# Altium PCB PCB1.PcbDoc
Units mil, origin at the board's own origin, x right, y up, seen from the top; angles counter-clockwise.
Board outline 3937.01 x 3937.01 mil, 2 copper layers (Top Layer, Bottom Layer), stack 12.8 mil thick; 17 components, 118 nets, 302 pads, 11 vias.
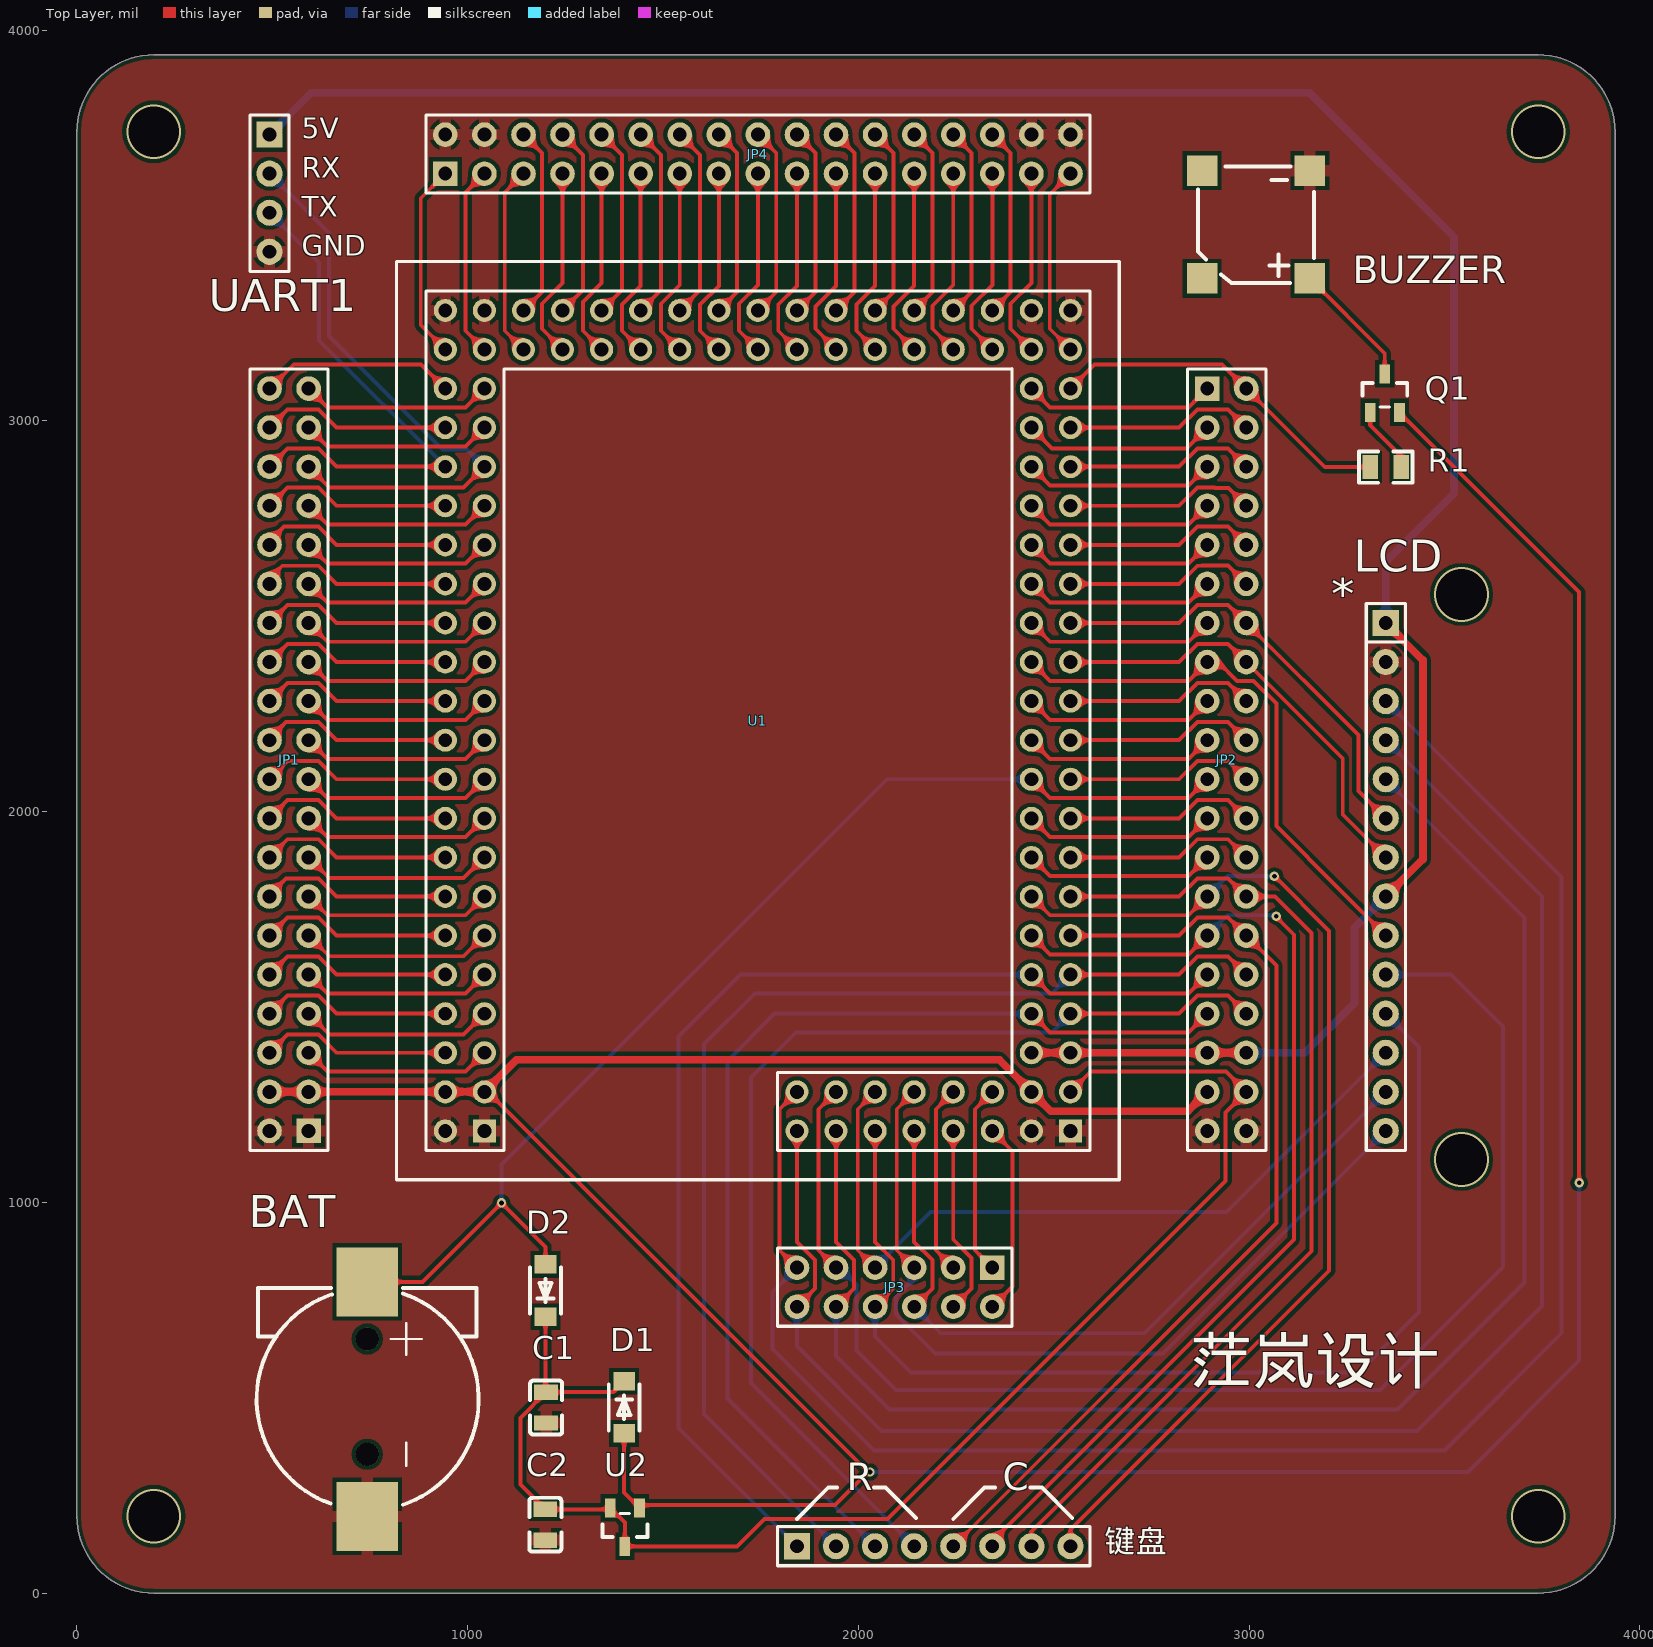
[diagram p0: Top Layer view]
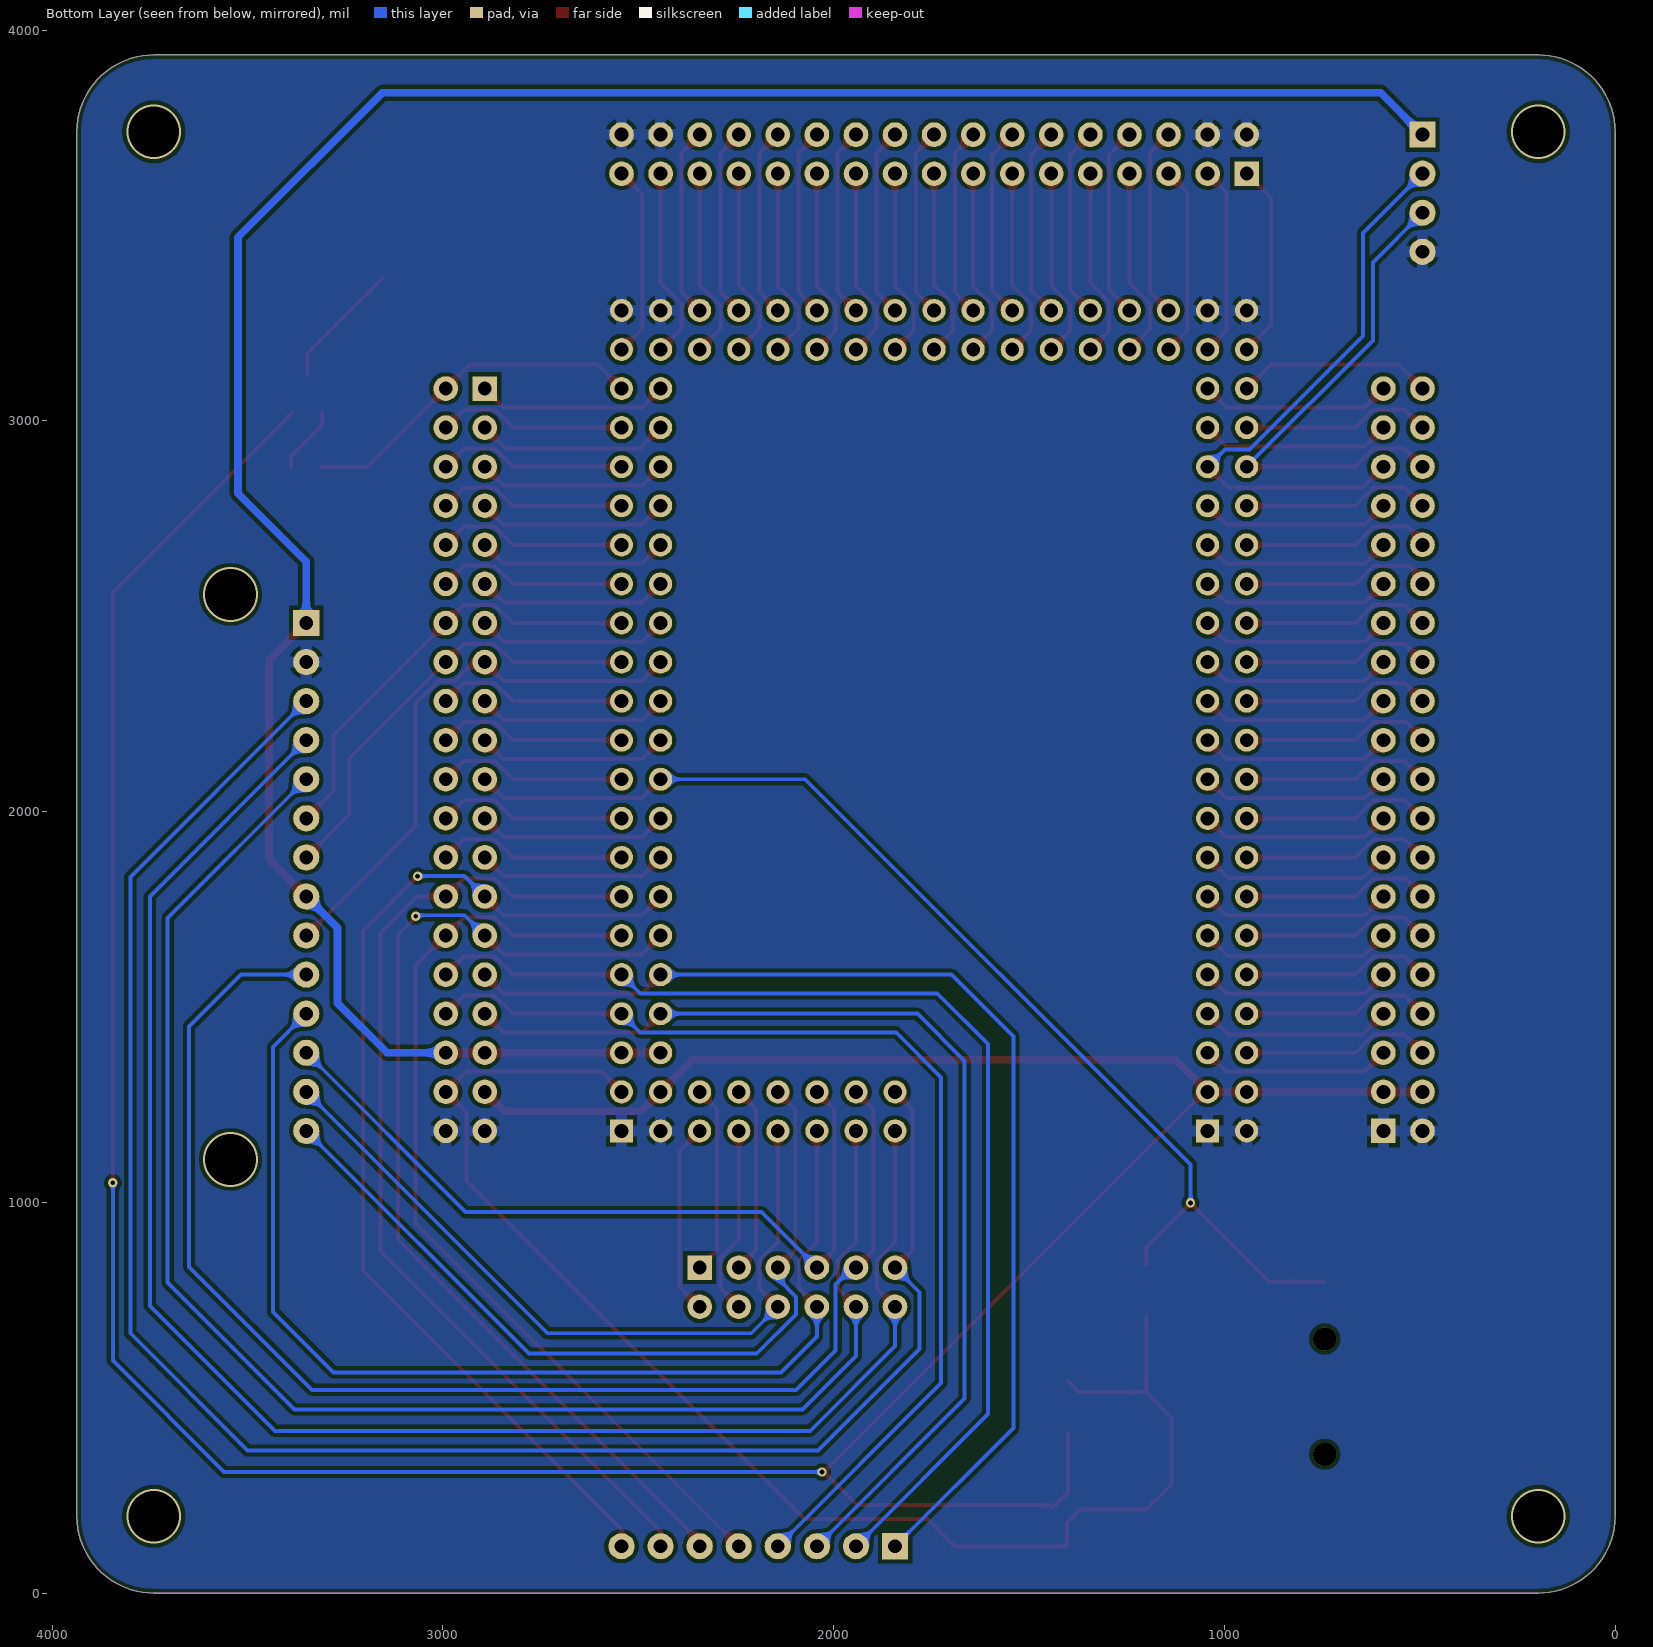
[diagram p1: Bottom Layer view, seen from below]

## Layer stack, top to bottom
Top Solder: solder mask 0.4, Solder Resist, Dk 3.5
Top Layer: signal copper 1.4
Dielectric 1: core 10, FR-4, Dk 4.2
Bottom Layer: signal copper 1.4
Solder Side: solder mask 0.4, Solder Resist, Dk 3.5

## Board outline
0,196.85 0,3740.16 cw(c196.85,3740.16) 196.85,3937.01 3740.16,3937.01 cw(c3740.16,3740.16) 3937.01,3740.16 3937.01,196.85 cw(c3740.16,196.85) 3740.16,0 196.85,0 cw(c196.85,196.85)

## Design rules (kind name [scope] priority, off if disabled: settings)
Clearance [All] p1: gap=10 ignorepadtopadclearanceinfootprint=FALSE except(0: Arc-Hole Track-Hole SMDPad-Hole THPad-Hole Via-Hole Fill-Hole Poly-Hole Region-Hole Text-Hole)
HoleSize [All] p1: absolutevalues=TRUE maxlimit=500 minlimit=1 maxpercent=80.000 minpercent=20.000
PlaneConnect [All] p1: planeconnectstyle=Relief reliefexpansion=20 reliefentries=4 reliefconductorwidth=15 reliefairgap=10
PolygonConnect [All] p1: connectstyle=Relief reliefconductorwidth=30 reliefentries=4 polygonreliefangle="90 Angle" airgapwidth=10
RoutingVias [All] p1: holewidth=24 width=12 viastyle="Through Hole" minholewidth=12 minwidth=24 maxholewidth=200 maxwidth=400
SilkToSolderMaskClearance [IsPad] p1: minsilkscreentomaskgap=1 clearancetoexposedcopper=TRUE
SolderMaskExpansion [All] p1: expansion=4
Width [All] p1: maxlimit=40 minlimit=10 preferedwidth=20
27 further rules are at their usual default settings.

## Components (designator, comment, footprint, x,y, rotation, side; value= is the part's Value field where it differs from the comment)
BAT "" BAT_SMD 745,495 r270 top
BUZZER "Buzzer" 7525蜂鸣器 3020,3500 r180 top (schematic designator Q2)
C1 "104" 0805C 1200,475 r90 top
C2 "104" 0805C 1200,175 r270 top
D1 "1N4148" SOD-123 1400,475 r90 top
D2 "1N4148" SOD-123 1200,775 r270 top
JP1 "Header 2X11" HDR-20X2 593,1183 r90 top
JP2 "Header 2X11" HDR-20X2 2893,3083 r270 top
JP3 "Header 6X2" HDR-6X2 2343,833 r180 top
JP4 "Header 2X11" HDR-17X2 943,3633 r0 top
LCD "HDR-1X14" HDR-1X14_M 3350,2483 r270 top
Q1 "S8550" BAT54C/S8550 3350,3065 r270 top
R1 "1K" 0805R 3350,2883 r0 top
U1 "STM32F407" STM32F407ZGT6 1743,2233 r90 top locked
U2 "BAT54C" BAT54C 1400,175 r90 top
UART1 "HDR-1X4" HDR-1X4 493,3733 r270 top locked
键盘 "HDR-1X8" HDR-1X8_M 1843,120 r0 top

## Footprints (in the part's own frame and the unit in brackets; to place one, negate y for a bottom-side part, rotate by r counter-clockwise, add the part's x,y. Pads: shape width x height; smd on the part's side, far side on the other; paste and mask are expansions set on the pad)
0805C [mm]
  rect 1x1.55 smd: 1(-1.003,-0.027) 2(0.997,-0.027)
  silkscreen extent -1.75,-1.07 1.75,1.01, body extent -1,-0.61 1,0.61, height 0.51
0805R [mm]
  rect 1x1.55 smd: 1(-1.003,-0.021) 2(0.997,-0.021)
  silkscreen extent -1.75,-1.04 1.75,1, body extent -1,-0.63 1,0.63, height 0.55
7525蜂鸣器 [mm]
  rect 2x2 smd: 1(-3.445,3.428) 2(-3.445,-3.572) 3(3.555,-3.572) 4(3.555,3.428)
  silkscreen extent -3.73,-3.83 3.81,3.74
BAT54C [mm]
  rect 1.25x0.7 smd: 1(1.092,0.886) 2(1.092,-1.014) 3(-1.407,-0.064)
  silkscreen extent -0.81,-1.52 0.74,1.4, body extent -1.53,-1.51 1.27,1.39, height 1.2
BAT54C/S8550 [mm]
  rect 1.25x0.7 smd: 1(1.092,0.886) 2(1.092,-1.014) 3(-1.407,-0.064)
  silkscreen extent -0.81,-1.52 0.74,1.4, body extent -1.53,-1.51 1.27,1.39, height 1.2
BAT_SMD [mm]
  rect 4.5x4 smd: 1(-7.656,-0.045) 2(7.584,-0.045)
  round 1.5 hole 1.5 unplated: ""(-3.947,-0.045) ""(3.546,-0.045)
  silkscreen extent -7.26,-7.23 6.83,7.2, body extent -9.33,-7.76 9.27,7.24, height 4.3
HDR-1X4 [mm] "排针，4脚"
  rect 1.7x1.7 hole 0.9: 1(0,0)
  round 1.7 hole 0.9: 2(2.54,0) 3(5.08,0) 4(7.62,0)
  silkscreen extent -1.27,-1.27 8.89,1.27, body extent -1.27,-1.27 8.89,1.27, height 8.5
HDR-1X8_M [mm] "排母，8脚"
  rect 1.7x1.7 hole 0.9: 1(0,0)
  round 1.7 hole 0.9: 2(2.54,0) 3(5.08,0) 4(7.62,0) 5(10.16,0) 6(12.7,0) 7(15.24,0) 8(17.78,0)
  silkscreen extent -1.27,-1.27 19.05,1.27, body extent -1.27,-1.27 19.05,1.27, height 8.5
HDR-1X14_M [mm] "排母，14脚"
  rect 1.7x1.7 hole 0.9: 1(0,0)
  round 1.7 hole 0.9: 2(2.54,0) 3(5.08,0) 4(7.62,0) 5(10.16,0) 6(12.7,0) 7(15.24,0) 8(17.78,0) 9(20.32,0) 10(22.86,0) 11(25.4,0) 12(27.94,0) 13(30.48,0) 14(33.02,0)
  silkscreen extent -1.27,-1.27 34.29,1.27, body extent -1.27,-1.27 34.29,1.27, height 8.5
HDR-6X2 [mm] "双排排针，6x2脚"
  rect 1.6x1.6 hole 0.9: 1(0,0)
  round 1.6 hole 0.9: 2(0,2.54) 3(2.54,0) 4(2.54,2.54) 5(5.08,0) 6(5.08,2.54) 7(7.62,0) 8(7.62,2.54) 9(10.16,0) 10(10.16,2.54) 11(12.7,0) 12(12.7,2.54)
  silkscreen extent -1.27,-1.27 13.97,3.81, body extent -1.27,-1.27 13.97,3.81, height 8.5
HDR-17X2 [mm] "双排排针，17x2脚"
  rect 1.6x1.6 hole 0.9: 1(0,0)
  round 1.6 hole 0.9: 2(0,2.54) 3(2.54,0) 4(2.54,2.54) 5(5.08,0) 6(5.08,2.54) 7(7.62,0) 8(7.62,2.54) 9(10.16,0) 10(10.16,2.54) 11(12.7,0) 12(12.7,2.54) 13(15.24,0) 14(15.24,2.54) 15(17.78,0) 16(17.78,2.54) 17(20.32,0) 18(20.32,2.54) 19(22.86,0) 20(22.86,2.54) 21(25.4,0) 22(25.4,2.54) 23(27.94,0) 24(27.94,2.54) 25(30.48,0) 26(30.48,2.54) 27(33.02,0) 28(33.02,2.54) 29(35.56,0) 30(35.56,2.54) 31(38.1,0) 32(38.1,2.54) 33(40.64,0) 34(40.64,2.54)
  silkscreen extent -1.27,-1.27 41.91,3.81, body extent -1.27,-1.27 41.91,3.81, height 8.5
HDR-20X2 [mm] "双排排针，20x2脚"
  rect 1.6x1.6 hole 0.9: 1(0,0)
  round 1.6 hole 0.9: 2(0,2.54) 3(2.54,0) 4(2.54,2.54) 5(5.08,0) 6(5.08,2.54) 7(7.62,0) 8(7.62,2.54) 9(10.16,0) 10(10.16,2.54) 11(12.7,0) 12(12.7,2.54) 13(15.24,0) 14(15.24,2.54) 15(17.78,0) 16(17.78,2.54) 17(20.32,0) 18(20.32,2.54) 19(22.86,0) 20(22.86,2.54) 21(25.4,0) 22(25.4,2.54) 23(27.94,0) 24(27.94,2.54) 25(30.48,0) 26(30.48,2.54) 27(33.02,0) 28(33.02,2.54) 29(35.56,0) 30(35.56,2.54) 31(38.1,0) 32(38.1,2.54) 33(40.64,0) 34(40.64,2.54) 35(43.18,0) 36(43.18,2.54) 37(45.72,0) 38(45.72,2.54) 39(48.26,0) 40(48.26,2.54)
  silkscreen extent -1.27,-1.27 49.53,3.81, body extent -1.27,-1.27 49.53,3.81, height 8.5
SOD-123 [mm]
  rect 1.2x1.4 smd: 1(-1.686,-0.016) 2(1.714,-0.016)
  silkscreen extent -1.49,-1.02 1.51,0.98, body extent -1.8,-0.89 2.05,0.81, height 1.42
STM32F407ZGT6 [mm]
  rect 1.5x1.5 hole 0.9: 1(-26.67,17.78) 113(-26.67,-20.32)
  round 1.5 hole 0.9: 2(-26.67,20.32) 3(-24.13,17.78) 4(-24.13,20.32) 5(-21.59,17.78) 6(-21.59,20.32) 7(-19.05,17.78) 8(-19.05,20.32) 9(-16.51,17.78) 10(-16.51,20.32) 11(-13.97,17.78) 12(-13.97,20.32) 13(-11.43,17.78) 14(-11.43,20.32) 15(-8.89,17.78) 16(-8.89,20.32) 17(-6.35,17.78) 18(-6.35,20.32) 19(-3.81,17.78) 20(-3.81,20.32) 21(-1.27,17.78) 22(-1.27,20.32) 23(1.27,17.78) 24(1.27,20.32) 25(3.81,17.78) 26(3.81,20.32) 27(6.35,17.78) 28(6.35,20.32) 29(8.89,17.78) 30(8.89,20.32) 31(11.43,17.78) 32(11.43,20.32) 33(13.97,17.78) 34(13.97,20.32) 35(16.51,17.78) 36(16.51,20.32) 37(19.05,17.78) 38(19.05,20.32) 39(21.59,17.78) 40(21.59,20.32) 41(24.13,17.78) 42(24.13,20.32) 43(26.67,17.78) 44(26.67,20.32) 45(24.13,15.24) 46(26.67,15.24) 47(24.13,12.7) 48(26.67,12.7) 49(24.13,10.16) 50(26.67,10.16) 51(24.13,7.62) 52(26.67,7.62) 53(24.13,5.08) 54(26.67,5.08) 55(24.13,2.54) 56(26.67,2.54) 57(24.13,0) 58(26.67,0) 59(24.13,-2.54) 60(26.67,-2.54) 61(24.13,-5.08) 62(26.67,-5.08) 63(24.13,-7.62) 64(26.67,-7.62) 65(24.13,-10.16) 66(26.67,-10.16) 67(24.13,-12.7) 68(26.67,-12.7) 69(24.13,-15.24) 70(26.67,-15.24) 71(24.13,-17.78) 72(26.67,-17.78) 73(24.13,-20.32) 74(26.67,-20.32) 75(21.59,-20.32) 76(21.59,-17.78) 77(19.05,-20.32) 78(19.05,-17.78) 79(16.51,-20.32) 80(16.51,-17.78) 81(13.97,-20.32) 82(13.97,-17.78) 83(11.43,-20.32) 84(11.43,-17.78) 85(8.89,-20.32) 86(8.89,-17.78) 87(6.35,-20.32) 88(6.35,-17.78) 89(3.81,-20.32) 90(3.81,-17.78) 91(1.27,-20.32) 92(1.27,-17.78) 93(-1.27,-20.32) 94(-1.27,-17.78) 95(-3.81,-20.32) 96(-3.81,-17.78) 97(-6.35,-20.32) 98(-6.35,-17.78) 99(-8.89,-20.32) 100(-8.89,-17.78) 101(-11.43,-20.32) 102(-11.43,-17.78) 103(-13.97,-20.32) 104(-13.97,-17.78) 105(-16.51,-20.32) 106(-16.51,-17.78) 107(-19.05,-20.32) 108(-19.05,-17.78) 109(-21.59,-20.32) 110(-21.59,-17.78) 111(-24.13,-20.32) 112(-24.13,-17.78) 114(-26.67,-17.78) 115(-26.67,-15.24) 116(-24.13,-15.24) 117(-26.67,-12.7) 118(-24.13,-12.7) 119(-26.67,-10.16) 120(-24.13,-10.16) 121(-26.67,-7.62) 122(-24.13,-7.62) 123(-26.67,-5.08) 124(-24.13,-5.08) 125(-26.67,-2.54) 126(-24.13,-2.54)
  silkscreen extent -29.84,-23.5 29.84,23.5, body extent -27.94,-21.59 27.94,21.59, height 8.5

## Part data
BAT: library part battery
C1 C2: library part Capacitor, "电容", BOM名称=无极性, 学习资源=www.ooocke.
D1 D2: library part 二极管
JP1 JP2: library part "Header 20X2u", "20*2P接插件", BOM名称=20*2P接, 学习资源=www.ooocke.
JP3: library part "Header  6X2u", "6*2P接插件", BOM名称=6*2P接, 学习资源=www.ooocke.
JP4: library part "Header 17X2u", "17*2P接插件", BOM名称=17*2P接, 学习资源=www.ooocke.
LCD: library part "Header 14u", "14P接插件", BOM名称=14P接, 学习资源=www.ooocke.
R1: library part Resistor, "电阻", BOM名称=ÌùÆ, 学习资源=www.ooocke.
U1: "Header, 126-Pin, Dual row", LatestRevisionDate=17-Jul-2002, LatestRevisionNote="Re-released for DXP Platform.", Publisher="Altium Limited"
UART1: library part "Header 4u", "4P接插件", BOM名称=4P接, 学习资源=www.ooocke.
键盘: library part "Header 8u", "8P接插件", BOM名称=8P接, 学习资源=www.ooocke.

## Via types
v1: diameter 140, hole 130, Top Layer to Bottom Layer, 6 vias
v2: diameter 24, hole 12, Top Layer to Bottom Layer, tented both sides, 5 vias

## Nets (pads, with @x,y where several pads share a name; then routed paths per layer and width w, separated by ;. In a path a pad name is that pad's centre, name@x,y a point inside that pad or via, vN(x,y) a via of type N, cw(c..) or ccw(c..) an arc to the next point about the centre after c; other vN are vias at no path point)
3.3V: D1.1 JP1.3 JP1.4 JP2.37 Q1.1 U1.3 U1.4 U1.112 U2.2 | length 9280.9
  Top Layer w10: U1.3 1052,1283 v2@2025,310 ; D1.1 1400.63,257.3 U2.2 1446.91,225 1940,225 v2@2025,310 ; v2(2030,310) v2@2025,310 ; Q1.1 3845,2561.88 v2(3845,1050)
  Top Layer w20: JP1.4@492.16,1282.16 JP1.4 JP1.3 U1.4 U1.3 1125,1365 2361,1365 U1.112 2492.53,1233.47 2843.47,1233.47 JP2.37
  Bottom Layer w10: v2(2030,310) 3560,310 3845,595 v2(3845,1050)
5V: JP2.35 JP2.36 LCD.1 LCD.8 U1.109 U1.110 UART1.1 | length 6265.5
  Top Layer w20: U1.110 U1.109 JP2.35 JP2.36 ; LCD.8 3445,1878 3445,2388 LCD.1
  Bottom Layer w20: UART1.1 600,3840 3155,3840 3525,3470 3525,2815 3350,2640 LCD.1 ; JP2.36 3143,1383 3270,1510 3270,1703 LCD.8 LCD.8@3338,1783
GND: BAT.2 BUZZER.2 C1.1 C2.2 JP1.1 JP1.2 JP2.39 JP2.40 JP4.2 JP4.4 JP4.32 JP4.34 LCD.2 U1.1 U1.2 U1.43 U1.44 U1.72 U1.74 U1.113 U1.114 UART1.4
NetQ1_2: Q1.2 R1.2 | length 172.6
  Top Layer w10: Q1.2 3310.08,2989.92 3389.27,2910.73 R1.2
NetQ1_3: BUZZER.1 Q1.3 | length 324.1
  Top Layer w10: BUZZER.1 3347.48,3173.19 Q1.3
PA0: BAT.1 D2.1 JP2.21 U1.96 | length 2983.8
  Top Layer w10: BAT.1 884.41,796.41 v2(1086.63,998.63) 1199.37,885.89 D2.1 ; U1.96 2491,2035 2845,2035 JP2.21
  Bottom Layer w10: v2(1086.63,998.63) 1086.63,1096.63 2073,2083 U1.96
PA1: JP2.20 U1.93 | length 488.5
  Top Layer w10: U1.93 2821.28,2183 2867.78,2229.5 2946.5,2229.5 JP2.20
PA2: JP2.19 U1.94 | length 489.8
  Top Layer w10: U1.94 2491,2135 2845,2135 JP2.19
PA3: JP2.18 U1.91 | length 488.5
  Top Layer w10: U1.91 2821.28,2283 2867.78,2329.5 2946.5,2329.5 JP2.18
PA4: JP2.17 U1.92 | length 489.8
  Top Layer w10: U1.92 2491,2235 2845,2235 JP2.17
PA5: JP2.16 LCD.7 U1.89 | length 1136.4
  Top Layer w10: U1.89 2821.28,2383 2867.78,2429.5 2946.5,2429.5 JP2.16 3240,2136 3240,1993 LCD.7
PA6: JP2.15 LCD.9 U1.90 | length 1423.7
  Top Layer w10: U1.90 2491,2335 2845,2335 JP2.15 2921.28,2383 2969.28,2335 3012,2335 3070,2277 3070,1963 3233,1800 LCD.9 LCD.9@3353,1683
PA7: JP2.14 LCD.6 U1.87 | length 1136.4
  Top Layer w10: U1.87 2821.28,2483 2867.78,2529.5 2946.5,2529.5 JP2.14 3280,2196 3280,2053 LCD.6
PA8: JP1.37 U1.37 | length 489.8
  Top Layer w10: JP1.37 641,2935 995,2935 U1.37
PA9: JP1.36 U1.36 UART1.3 | length 1324.9
  Top Layer w10: JP1.36 539.5,2929.5 618.22,2929.5 664.72,2883 U1.36
  Bottom Layer w10: UART1.3 620,3406 620,3206 U1.36
PA10: JP1.35 U1.35 UART1.2 | length 1508.6
  Top Layer w10: JP1.35 646,2830 990,2830 U1.35
  Bottom Layer w10: UART1.2 645,3481 645,3218.03 935.5,2927.53 998.47,2927.53 U1.35
PA11: JP1.34 U1.34 | length 488.5
  Top Layer w10: JP1.34 539.5,2829.5 618.22,2829.5 664.72,2783 U1.34
PA12: JP1.33 U1.33 | length 489.8
  Top Layer w10: JP1.33 641,2735 995,2735 U1.33
PA13: JP1.32 U1.32 | length 493.8
  Top Layer w10: JP1.32 493,2691.99 530.5,2729.5 618.22,2729.5 664.72,2683 U1.32
PA14: JP1.31 U1.31 | length 489.8
  Top Layer w10: JP1.31 641,2635 995,2635 U1.31
PA15: JP1.30 U1.30 | length 496.7
  Top Layer w10: JP1.30 493,2596.99 525.5,2629.5 618.22,2629.5 664.72,2583 U1.30
PB0: JP2.11 U1.86 | length 489.8
  Top Layer w10: U1.86 2491,2535 2845,2535 JP2.11
PB1: JP2.10 U1.83 | length 488.5
  Top Layer w10: U1.83 2821.28,2683 2867.78,2729.5 2946.5,2729.5 JP2.10
PB2: JP2.9 U1.84 | length 489.8
  Top Layer w10: U1.84 2491,2635 2845,2635 JP2.9
PB3: JP1.11 U1.11 | length 493.9
  Top Layer w10: JP1.11 646,1630 990,1630 U1.11
PB4: JP1.10 U1.10 | length 488.5
  Top Layer w10: JP1.10 539.5,1629.5 618.22,1629.5 664.72,1583 U1.10
PB5: JP1.9 U1.9 | length 489.8
  Top Layer w10: JP1.9 641,1535 995,1535 U1.9
PB6: JP1.8 U1.8 | length 488.5
  Top Layer w10: JP1.8 539.5,1529.5 618.22,1529.5 664.72,1483 U1.8
PB7: JP1.7 U1.7 | length 493.9
  Top Layer w10: JP1.7 646,1430 990,1430 U1.7
PB8: JP1.6 U1.6 | length 488.5
  Top Layer w10: JP1.6 539.5,1429.5 618.22,1429.5 664.72,1383 U1.6
PB9: JP1.5 U1.5 | length 489.8
  Top Layer w10: JP1.5 641,1335 995,1335 U1.5
PB10: JP4.24 U1.64 | length 488.9
  Top Layer w10: U1.64 2090,3330 2090,3686 JP4.24
PB11: JP4.23 U1.63 | length 489.8
  Top Layer w10: U1.63 1995,3231 1995,3297.97 2043,3345.97 JP4.23
PB12: JP4.22 U1.62 | length 488.9
  Top Layer w10: U1.62 1990,3330 1990,3686 JP4.22
PB13: JP4.21 U1.61 | length 493.9
  Top Layer w10: U1.61 1890,3236 1890,3292.97 1943,3345.97 JP4.21
PB14: JP4.20 U1.60 | length 488.9
  Top Layer w10: U1.60 1890,3330 1890,3686 JP4.20
PB15: JP4.19 U1.59 | length 489.8
  Top Layer w10: U1.59 1795,3231 1795,3297.97 1843,3345.97 JP4.19
PC0: JP2.25 U1.100 | length 489.8
  Top Layer w10: U1.100 2491,1835 2845,1835 JP2.25
PC1: JP2.24 U1.97 | length 488.5
  Top Layer w10: U1.97 2821.28,1983 2867.78,2029.5 2946.5,2029.5 JP2.24
PC2: JP2.23 U1.98 | length 489.8
  Top Layer w10: U1.98 2491,1935 2845,1935 JP2.23
PC3: JP2.22 U1.95 | length 488.5
  Top Layer w10: U1.95 2821.28,2083 2867.78,2129.5 2946.5,2129.5 JP2.22
PC4: JP2.13 U1.88 | length 489.8
  Top Layer w10: U1.88 2491,2435 2845,2435 JP2.13
PC5: JP2.12 U1.85 | length 488.9
  Top Layer w10: U1.85 2821.28,2583 2867.78,2629.5 2879.5,2629.5 2880,2630 2946,2630 JP2.12
PC6: JP4.3 U1.41 | length 489.8
  Top Layer w10: U1.41 995,3231 995,3585 JP4.3
PC7: JP1.40 U1.40 | length 501.4
  Top Layer w10: JP1.40 555,3145 881,3145 U1.40
PC8: JP1.39 U1.39 | length 489.8
  Top Layer w10: JP1.39 641,3035 995,3035 U1.39
PC9: JP1.38 U1.38 | length 488.5
  Top Layer w10: JP1.38 539.5,3029.5 618.22,3029.5 664.72,2983 U1.38
PC10: JP1.29 U1.29 | length 489.8
  Top Layer w10: JP1.29 641,2535 995,2535 U1.29
PC11: JP1.28 U1.28 | length 488.5
  Top Layer w10: JP1.28 539.5,2529.5 618.22,2529.5 664.72,2483 U1.28
PC12: JP1.27 U1.27 | length 489.8
  Top Layer w10: JP1.27 641,2435 995,2435 U1.27
PC13: JP3.5 LCD.14 U1.120 | length 2156.9
  Top Layer w10: JP3.5@2143,804.72 JP3.5 2098.47,877.53 2098.47,1238.47 U1.120
  Bottom Layer w10: JP3.5@2143,804.72 2096.5,758.22 2096.5,713.5 2197,613 2780,613 LCD.14
PC14: JP3.4 U1.117 | length 488.9
  Top Layer w10: JP3.4 2290,780 2290,857.72 2243,904.72 U1.117
PC15: JP3.3 U1.118 | length 486.9
  Top Layer w10: JP3.3 2198.47,877.53 2198.47,1238.47 U1.118
PD0: JP1.26 U1.26 | length 488.5
  Top Layer w10: JP1.26 539.5,2429.5 618.22,2429.5 664.72,2383 U1.26
PD1: JP1.25 U1.25 | length 489.8
  Top Layer w10: JP1.25 641,2335 995,2335 U1.25
PD2: JP1.24 U1.24 | length 488.5
  Top Layer w10: JP1.24 539.5,2329.5 618.22,2329.5 664.72,2283 U1.24
PD3: JP1.23 U1.23 | length 489.8
  Top Layer w10: JP1.23 641,2235 995,2235 U1.23
PD4: JP1.22 U1.22 | length 490.9
  Top Layer w10: JP1.22 493,2186.99 535.5,2229.5 618.22,2229.5 664.72,2183 U1.22
PD5: JP1.21 U1.21 | length 489.8
  Top Layer w10: JP1.21 641,2135 995,2135 U1.21
PD6: JP1.20 U1.20 | length 488.5
  Top Layer w10: JP1.20 539.5,2129.5 618.22,2129.5 664.72,2083 U1.20
PD7: JP1.19 U1.19 | length 489.8
  Top Layer w10: JP1.19 641,2035 995,2035 U1.19
PD8: JP4.18 U1.58 | length 488.9
  Top Layer w10: U1.58 1790,3330 1790,3686 JP4.18
PD9: JP4.17 U1.57 | length 489.8
  Top Layer w10: U1.57 1695,3231 1695,3300 1743,3348 JP4.17
PD10: JP4.16 U1.56 | length 488.9
  Top Layer w10: U1.56 1690,3330 1690,3686 JP4.16
PD11: JP4.15 U1.55 | length 489.8
  Top Layer w10: U1.55 1595,3231 1595,3297.97 1643,3345.97 JP4.15
PD12: JP4.14 U1.54 | length 493.1
  Top Layer w10: U1.54 1595,3335 1595,3681 JP4.14
PD13: JP4.13 U1.53 | length 489.8
  Top Layer w10: U1.53 1495,3231 1495,3300 1543,3348 JP4.13
PD14: JP4.12 U1.52 | length 493.1
  Top Layer w10: U1.52 1495,3335 1495,3681 JP4.12
PD15: JP4.11 U1.51 | length 489.8
  Top Layer w10: U1.51 1395,3231 1395,3297.97 1443,3345.97 JP4.11
PE0: JP3.12 LCD.4 U1.125 | length 4332.6
  Top Layer w10: JP3.12 1889.5,779.5 1889.5,852.26 1843,898.76 U1.125
  Bottom Layer w10: JP3.12 1843,632 2060,415 3430,415 3750,735 3750,1783 LCD.4
PE1: JP3.11 LCD.3 U1.126 | length 4777.3
  Top Layer w10: JP3.11 1798.47,877.53 1798.47,1238.47 U1.126
  Bottom Layer w10: JP3.11 1780,770 1780,625 2040,365 3500,365 3800,665 3800,1833 LCD.3
PE2: JP3.10 LCD.5 U1.123 | length 4002.9
  Top Layer w10: JP3.10 1989.5,779.5 1989.5,852.26 1943,898.76 U1.123
  Bottom Layer w10: JP3.10 1943,607 2080,470 3380,470 3705,795 3705,1728 LCD.5
PE3: JP3.9 LCD.10 U1.124 | length 3551.2
  Top Layer w10: JP3.9@1943,804.72 JP3.9 1898.47,877.53 1898.47,1238.47 U1.124
  Bottom Layer w10: JP3.9 1952,833 1995,790 1995,621.28 2096.28,520 3335,520 3650,835 3650,1450 3517,1583 LCD.10
PE4: JP3.8 LCD.11 U1.121 | length 2868
  Top Layer w10: JP3.8@2043,722 JP3.8 2089.5,779.5 2089.5,852.26 2043,898.76 U1.121
  Bottom Layer w10: JP3.8 2043,657 2135,565 3280,565 3435,720 3435,1398 LCD.11
PE5: JP3.7 LCD.12 U1.122 | length 2021.7
  Top Layer w10: JP3.7 1998.47,877.53 1998.47,1238.47 U1.122
  Bottom Layer w10: JP3.7 2185,975 2548,975 2942,975 LCD.12
PE6: JP3.6 LCD.13 U1.119 | length 1979.7
  Top Layer w10: JP3.6 2189.5,779.5 2189.5,852.26 2143,898.76 U1.119
  Bottom Layer w10: JP3.6 2211,665 2732,665 LCD.13
PE7: JP2.1 U1.76 | length 489.8
  Top Layer w10: U1.76 2491,3035 2845,3035 JP2.1
PE8: JP4.33 U1.73 | length 493.9
  Top Layer w10: U1.73 2490,3236 2490,3580 JP4.33
PE9: JP4.31 U1.71 | length 493.9
  Top Layer w10: U1.71 2390,3236 2390,3300 2443,3353 JP4.31
PE10: JP4.30 U1.70 | length 488.9
  Top Layer w10: U1.70 2390,3330 2390,3686 JP4.30
PE11: JP4.29 U1.69 | length 493.9
  Top Layer w10: U1.69 2290,3236 2290,3295 2343,3348 JP4.29
PE12: JP4.28 U1.68 | length 488.9
  Top Layer w10: U1.68 2290,3330 2290,3686 JP4.28
PE13: JP4.27 U1.67 | length 493.9
  Top Layer w10: U1.67 2190,3236 2190,3295 2243,3348 JP4.27
PE14: JP4.26 U1.66 | length 488.9
  Top Layer w10: U1.66 2190,3330 2190,3686 JP4.26
PE15: JP4.25 U1.65 | length 493.9
  Top Layer w10: U1.65 2090,3236 2090,3292.97 2143,3345.97 JP4.25
PF0: JP3.2 U1.115 | length 493.1
  Top Layer w10: JP3.2 2395,785 2395,1131 U1.115
PF1: JP3.1 U1.116 | length 486.9
  Top Layer w10: JP3.1 2298.47,877.53 2298.47,1238.47 U1.116
PF2: JP2.34 U1.107 键盘.4 | length 2747.2
  Top Layer w10: U1.107 2821.28,1483 2867.78,1529.5 2946.5,1529.5 JP2.34
  Bottom Layer w10: 键盘.4 1725,538 1725,1320 1840,1435 2495,1435 U1.107
PF3: JP2.33 U1.108 键盘.3 | length 2716.5
  Top Layer w10: U1.108 2491,1435 2845,1435 JP2.33
  Bottom Layer w10: 键盘.3 1665,498 1665,1362 1786,1483 U1.108
PF4: JP2.32 U1.105 键盘.2 | length 2925.3
  Top Layer w10: U1.105 2821.28,1583 2867.78,1629.5 2946.5,1629.5 JP2.32
  Bottom Layer w10: 键盘.2 1605,458 1605,1405 1735,1535 2495,1535 U1.105
PF5: JP2.31 U1.106 键盘.1 | length 2888.7
  Top Layer w10: U1.106 2491,1535 2845,1535 JP2.31
  Bottom Layer w10: 键盘.1 1540,423 1540,1425 1698,1583 U1.106
PF6: JP2.30 U1.103 键盘.5 | length 2426
  Top Layer w10: 键盘.5 3070,947 3070,1606 JP2.30 2946.5,1729.5 2867.78,1729.5 2821.28,1683 U1.103
PF7: JP2.29 U1.104 键盘.6 | length 2643.8
  Top Layer w10: 键盘.6 2343,133 3115,905 3115,1685 3067.5,1732.5 v2(3070,1732.5) ; U1.104 2491,1635 2845,1635 JP2.29
  Bottom Layer w10: JP2.29 2945,1735 3067.5,1735 v2(3070,1732.5)
PF8: JP2.28 U1.101 键盘.7 | length 2561
  Top Layer w10: 键盘.7 2443,158 3160,875 3160,1690 3067,1783 JP2.28 2946.5,1829.5 2867.78,1829.5 2821.28,1783 U1.101
PF9: JP2.27 U1.102 键盘.8 | length 2730.5
  Top Layer w10: U1.102 2491,1735 2845,1735 JP2.27 ; 键盘.8 2543,163 3205,825 3205,1695 v2(3065,1835)
  Bottom Layer w10: JP2.27 2945,1835 v2(3065,1835)
PF10: JP2.26 U1.99 | length 488.5
  Top Layer w10: U1.99 2821.28,1883 2867.78,1929.5 2946.5,1929.5 JP2.26
PF11: JP2.8 U1.81 | length 488.5
  Top Layer w10: U1.81 2821.28,2783 2867.78,2829.5 2912.26,2829.5 2912.92,2828.84 2947.16,2828.84 JP2.8
PF12: JP2.7 U1.82 | length 489.8
  Top Layer w10: U1.82 2491,2735 2845,2735 JP2.7
PF13: JP2.6 U1.79 | length 488.5
  Top Layer w10: U1.79 2821.28,2883 2867.78,2929.5 2946.5,2929.5 JP2.6
PF14: JP2.5 U1.80 | length 489.8
  Top Layer w10: U1.80 2491,2835 2845,2835 JP2.5
PF15: JP2.4 U1.77 | length 488.5
  Top Layer w10: U1.77 2821.28,2983 2867.78,3029.5 2946.5,3029.5 JP2.4
PG0: JP2.3 U1.78 | length 493.9
  Top Layer w10: U1.78 2496,2930 2840,2930 JP2.3
PG1: JP2.2 R1.1 U1.75 | length 902.1
  Top Layer w10: U1.75 2605,3145 2931,3145 JP2.2 3193.84,2882.16 R1.1
PG2: JP4.10 U1.50 | length 493.1
  Top Layer w10: U1.50 1395,3335 1395,3681 JP4.10
PG3: JP4.9 U1.49 | length 489.8
  Top Layer w10: U1.49 1295,3231 1295,3305 1343,3353 JP4.9
PG4: JP4.8 U1.48 | length 493.1
  Top Layer w10: U1.48 1295,3335 1295,3681 JP4.8
PG5: JP4.7 U1.47 | length 493.9
  Top Layer w10: U1.47 1190,3236 1190,3300 1243,3353 JP4.7
PG6: JP4.6 U1.46 | length 488.9
  Top Layer w10: U1.46 1190,3330 1190,3686 JP4.6
PG7: JP4.5 U1.45 | length 489.8
  Top Layer w10: U1.45 1095,3231 1095,3585 JP4.5
PG8: JP4.1 U1.42 | length 502.2
  Top Layer w10: U1.42 880,3246 880,3570 JP4.1
PG9: JP1.18 U1.18 | length 488.5
  Top Layer w10: JP1.18 539.5,2029.5 618.22,2029.5 664.72,1983 U1.18
PG10: JP1.17 U1.17 | length 489.8
  Top Layer w10: JP1.17 641,1935 995,1935 U1.17
PG11: JP1.16 U1.16 | length 488.5
  Top Layer w10: JP1.16 539.5,1929.5 618.22,1929.5 664.72,1883 U1.16
PG12: JP1.15 U1.15 | length 493.9
  Top Layer w10: JP1.15 646,1830 990,1830 U1.15
PG13: JP1.14 U1.14 | length 490.9
  Top Layer w10: JP1.14 493,1786.99 535.5,1829.5 618.22,1829.5 664.72,1783 U1.14
PG14: JP1.13 U1.13 | length 489.8
  Top Layer w10: JP1.13 641,1735 995,1735 U1.13
PG15: JP1.12 U1.12 | length 488.5
  Top Layer w10: JP1.12 539.5,1729.5 618.22,1729.5 664.72,1683 U1.12
VBAT: C1.2 C2.1 D1.2 D2.2 JP2.38 U1.111 U2.1 U2.3 | length 3708.4
  Top Layer w10: D2.2 1199.37,515.95 C1.2 ; D1.2 1372.42,514.27 C1.2 ; U1.111 2595,1335 2941,1335 JP2.38 2940,1230 2940,1055 2075,190 1760,190 1689.61,119.61 U2.3 1402.52,180.61 U2.1 1361.58,214.47 C2.1 1135,278.42 1135,448.21 C1.2
pads on no net: BAT. BUZZER.3 BUZZER.4
copper on no net:
  other v1: 196.85,196.85 3740.16,196.85 3544,1110 3544,2556 196.85,3740.16 3740.16,3740.16

## Polygon pours and split planes (outlines as drawn)
GND on Top Layer "GND_L01_P012" (solid, remove dead copper, pour order 12): 0,3937.01 0,0 3937.01,0 3937.01,3937.01
GND on Bottom Layer "GND_L02_P014" (solid, remove dead copper, pour order 14): 3937.01,3937.01 3937.01,0 0,0 0,3937.01

## Keep-outs
Keep-Out Layer:
  lines w1: 0,196.85 ccw(c196.85,196.85) 196.85,0 3740.16,0 ccw(c3740.16,196.85) 3937.01,196.85 3937.01,3740.16 ccw(c3740.16,3740.16) 3740.16,3937.01 196.85,3937.01 ccw(c196.85,3740.16) 0,3740.16 0,196.85

## Other copper
Top Layer:
  region net 3.3V: 778,80

## Silkscreen, mask and mechanical layers (free items; w line width, h text height)
Top Overlay:
  lines w10: 1843,190 1923,270 1945,270 ; 2040,270 2070,270 2147.5,192.5 ; 2243,190 2323,270 2350,270 ; 2440,270 2470,270 2547.5,192.5
  text "5V" at 575,3705.16 h90
  text "RX" at 575,3605 h90
  text "TX" at 575,3505 h90
  text "GND" at 575,3405 h90
  text "*" at 3210,2483 h150
  text "茳岚设计" at 2850,500 h200
  text "R" at 1970,240 h120
  text "C" at 2370,240 h120
Mechanical 1:
  lines w1: 0,196.85 ccw(c196.85,196.85) 196.85,0 3740.16,0 ccw(c3740.16,196.85) 3937.01,196.85 3937.01,3740.16 ccw(c3740.16,3740.16) 3740.16,3937.01 196.85,3937.01 ccw(c196.85,3740.16) 0,3740.16 0,196.85